# Altium PCB PCB1.PcbDoc (part 2 of 2)
Units mil, origin at the board's own origin, x right, y up, seen from the top; angles counter-clockwise.
Board outline 8251 x 7030 mil, 4 copper layers (Top Layer, Mid-Layer 1, Mid-Layer 2, Bottom Layer); 230 components, 122 nets, 652 pads, 23 vias.
Unrouted connection lines stored in the file: 312.
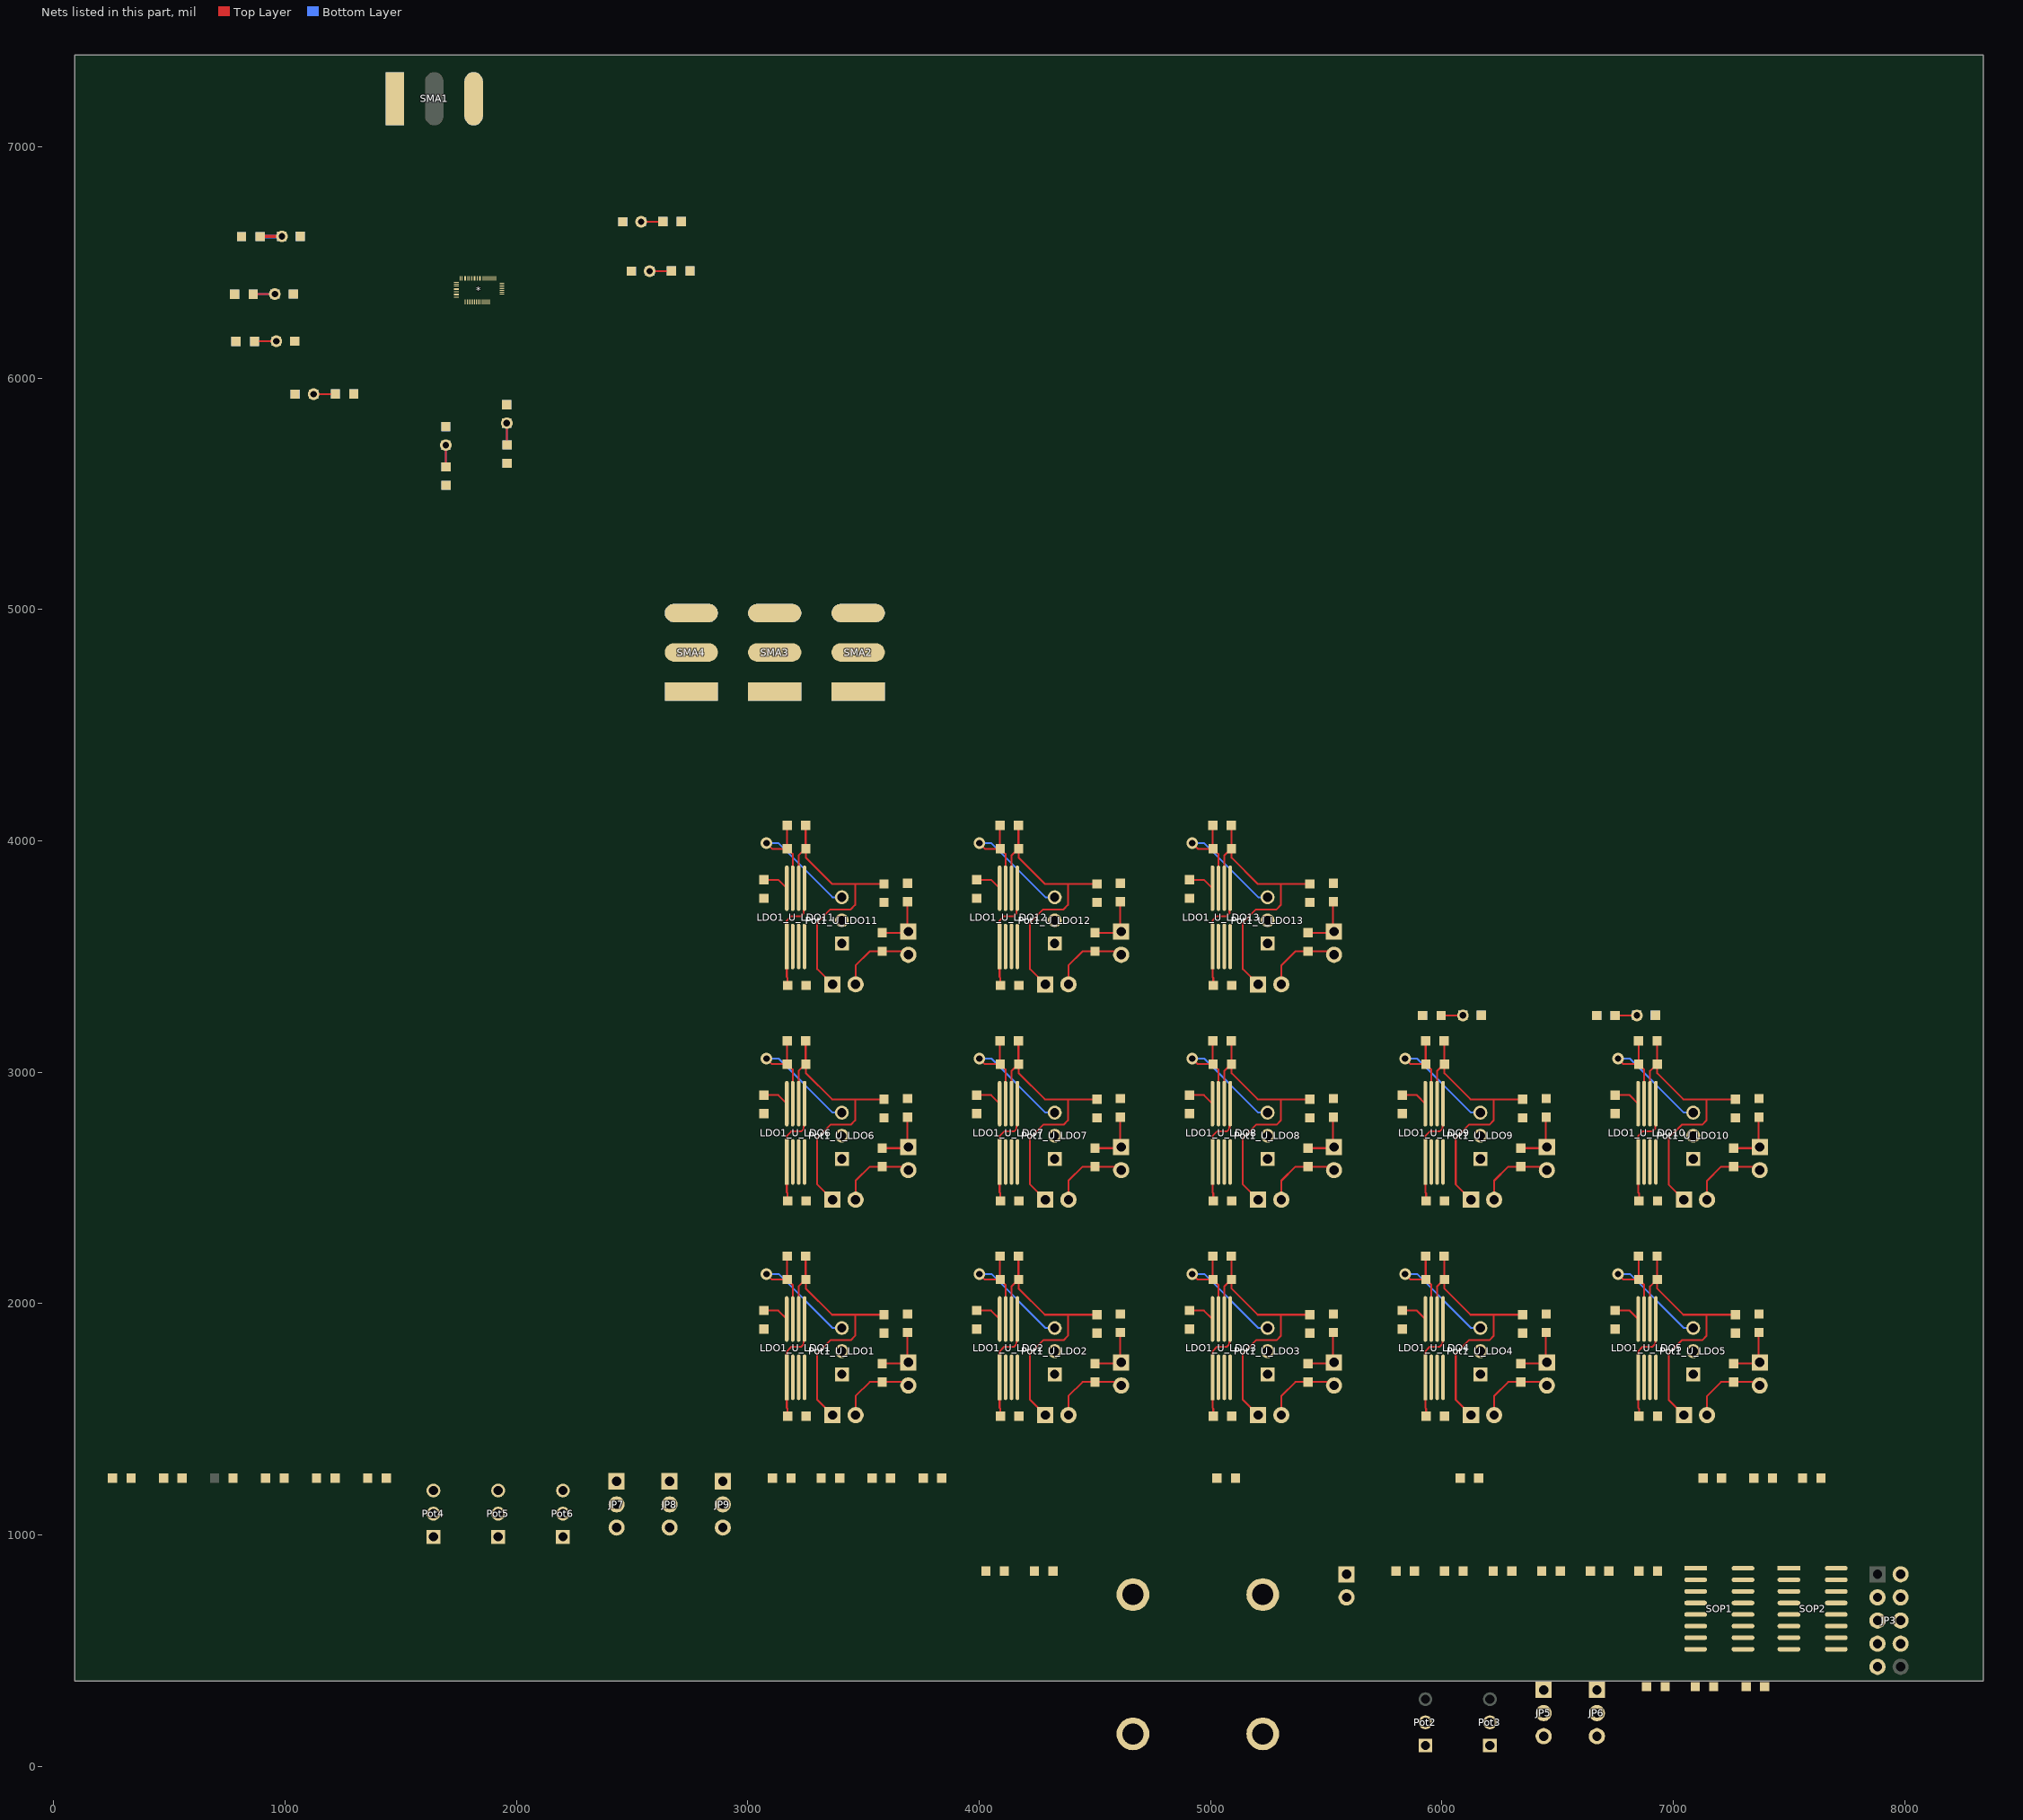
[diagram p2: the nets of this part, all layers, seen from the top]

## Components (designator, comment, footprint, x,y, rotation, side; value= is the part's Value field where it differs from the comment) (continued)
JP2_U_LDO12 "JP2" JUMPER2 4614,3608 r0 top (schematic designator JP2)
JP2_U_LDO13 "JP2" JUMPER2 5534,3608 r0 top (schematic designator JP2)
JP3 "JP10" JUMPER10 7883,830 r0 top
JP4 "JP2" JUMPER2 5588,830 r0 top
JP5 "JP3" JUMPER3 6440,330 r0 top
JP6 "JP3" JUMPER3 6670,330 r0 top
JP7 "JP3" JUMPER3 2433,1232 r0 top
JP8 "JP3" JUMPER3 2662,1232 r0 top
JP9 "JP3" JUMPER3 2892,1232 r0 top
LDO1_U_LDO1 "LDO" LT3060 3168.5,1681.5 r90 top (schematic designator LDO1)
LDO1_U_LDO2 "LDO" LT3060 4088.5,1681.5 r90 top (schematic designator LDO1)
LDO1_U_LDO3 "LDO" LT3060 5008.5,1681.5 r90 top (schematic designator LDO1)
LDO1_U_LDO4 "LDO" LT3060 5928.5,1681.5 r90 top (schematic designator LDO1)
LDO1_U_LDO5 "LDO" LT3060 6848.5,1681.5 r90 top (schematic designator LDO1)
LDO1_U_LDO6 "LDO" LT3060 3168.5,2612.5 r90 top (schematic designator LDO1)
LDO1_U_LDO7 "LDO" LT3060 4088.5,2612.5 r90 top (schematic designator LDO1)
LDO1_U_LDO8 "LDO" LT3060 5008.5,2612.5 r90 top (schematic designator LDO1)
LDO1_U_LDO9 "LDO" LT3060 5928.5,2612.5 r90 top (schematic designator LDO1)
LDO1_U_LDO10 "LDO" LT3060 6848.5,2612.5 r90 top (schematic designator LDO1)
LDO1_U_LDO11 "LDO" LT3060 3168.5,3543.5 r90 top (schematic designator LDO1)
LDO1_U_LDO12 "LDO" LT3060 4088.5,3543.5 r90 top (schematic designator LDO1)
LDO1_U_LDO13 "LDO" LT3060 5008.5,3543.5 r90 top (schematic designator LDO1)
Pot1_U_LDO1 "200k ohm" Pot 3406.5,1694.5 r90 top (schematic designator Pot1)
Pot1_U_LDO2 "200k ohm" Pot 4326.5,1694.5 r90 top (schematic designator Pot1)
Pot1_U_LDO3 "200k ohm" Pot 5246.5,1694.5 r90 top (schematic designator Pot1)
Pot1_U_LDO4 "200k ohm" Pot 6166.5,1694.5 r90 top (schematic designator Pot1)
Pot1_U_LDO5 "200k ohm" Pot 7086.5,1694.5 r90 top (schematic designator Pot1)
Pot1_U_LDO6 "200k ohm" Pot 3406.5,2625.5 r90 top (schematic designator Pot1)
Pot1_U_LDO7 "200k ohm" Pot 4326.5,2625.5 r90 top (schematic designator Pot1)
Pot1_U_LDO8 "200k ohm" Pot 5246.5,2625.5 r90 top (schematic designator Pot1)
Pot1_U_LDO9 "200k ohm" Pot 6166.5,2625.5 r90 top (schematic designator Pot1)
Pot1_U_LDO10 "200k ohm" Pot 7086.5,2625.5 r90 top (schematic designator Pot1)
Pot1_U_LDO11 "200k ohm" Pot 3406.5,3556.5 r90 top (schematic designator Pot1)
Pot1_U_LDO12 "200k ohm" Pot 4326.5,3556.5 r90 top (schematic designator Pot1)
Pot1_U_LDO13 "200k ohm" Pot 5246.5,3556.5 r90 top (schematic designator Pot1)
Pot2 "1k pot" Pot 5929,90 r90 top
Pot3 "1k pot" Pot 6208,90 r90 top
Pot4 "10k pot" Pot 1641,992 r90 top
Pot5 "10k pot" Pot 1921,992 r90 top
Pot6 "10k pot" Pot 2201,992 r90 top
R1_U_LDO1 "5 ohm" Resistor 3581,1701 r270 top (schematic designator R1)
R1_U_LDO2 "5 ohm" Resistor 4501,1701 r270 top (schematic designator R1)
R1_U_LDO3 "5 ohm" Resistor 5421,1701 r270 top (schematic designator R1)
R1_U_LDO4 "5 ohm" Resistor 6341,1701 r270 top (schematic designator R1)
R1_U_LDO5 "5 ohm" Resistor 7261,1701 r270 top (schematic designator R1)
R1_U_LDO6 "5 ohm" Resistor 3581,2632 r270 top (schematic designator R1)
R1_U_LDO7 "5 ohm" Resistor 4501,2632 r270 top (schematic designator R1)
R1_U_LDO8 "5 ohm" Resistor 5421,2632 r270 top (schematic designator R1)
R1_U_LDO9 "5 ohm" Resistor 6341,2632 r270 top (schematic designator R1)
R1_U_LDO10 "5 ohm" Resistor 7261,2632 r270 top (schematic designator R1)
R1_U_LDO11 "5 ohm" Resistor 3581,3563 r270 top (schematic designator R1)
R1_U_LDO12 "5 ohm" Resistor 4501,3563 r270 top (schematic designator R1)
R1_U_LDO13 "5 ohm" Resistor 5421,3563 r270 top (schematic designator R1)
R2_U_LDO1 "36k ohm" Resistor 3210,2205 r0 top (schematic designator R2)
R2_U_LDO2 "36k ohm" Resistor 4130,2205 r0 top (schematic designator R2)
R2_U_LDO3 "36k ohm" Resistor 5050,2205 r0 top (schematic designator R2)
R2_U_LDO4 "36k ohm" Resistor 5970,2205 r0 top (schematic designator R2)
R2_U_LDO5 "36k ohm" Resistor 6890,2205 r0 top (schematic designator R2)
R2_U_LDO6 "36k ohm" Resistor 3210,3136 r0 top (schematic designator R2)
R2_U_LDO7 "36k ohm" Resistor 4130,3136 r0 top (schematic designator R2)
R2_U_LDO8 "36k ohm" Resistor 5050,3136 r0 top (schematic designator R2)
R2_U_LDO9 "36k ohm" Resistor 5970,3136 r0 top (schematic designator R2)
R2_U_LDO10 "36k ohm" Resistor 6890,3136 r0 top (schematic designator R2)
R2_U_LDO11 "36k ohm" Resistor 3210,4067 r0 top (schematic designator R2)
R2_U_LDO12 "36k ohm" Resistor 4130,4067 r0 top (schematic designator R2)
R2_U_LDO13 "36k ohm" Resistor 5050,4067 r0 top (schematic designator R2)
R3 "10k" Resistor 6892,844 r0 top
R4 "10k" Resistor 6682,844 r0 top
R5 "10k" Resistor 6262,844 r0 top
R6 "10k" Resistor 6472,844 r0 top
R7 "10k" Resistor 5842,844 r0 top
R8 "10k" Resistor 6052,844 r0 top
R9 "100" Resistor 6925,344 r0 top
R10 "100" Resistor 7135,344 r0 top
R11 "1k" Resistor 3147,1246 r0 top
R12 "1k" Resistor 3357,1246 r0 top
R13 "1k" Resistor 3577,1246 r0 top
R14 "1k" Resistor 956,1246 r0 top
R15 "1k" Resistor 1176,1246 r0 top
R16 "1k" Resistor 1397,1246 r0 top
R17_U_SUPPLY_DECAP_NW1 "2ohm" Resistor 6131,3246 r0 top (schematic designator R17)
R17_U_SUPPLY_DECAP_NW2 "2ohm" Resistor 6883,3246 r0 top (schematic designator R17)
R17_U_SUPPLY_DECAP_NW3 "2ohm" Resistor 1083,5931 r180 top (schematic designator R17)
R17_U_SUPPLY_DECAP_NW4 "2ohm" Resistor 2499,6676 r180 top (schematic designator R17)
R17_U_SUPPLY_DECAP_NW5 "2ohm" Resistor 2536,6463 r180 top (schematic designator R17)
R17_U_SUPPLY_DECAP_NW6 "2ohm" Resistor 1695,5751 r90 top (schematic designator R17)
R17_U_SUPPLY_DECAP_NW7 "2ohm" Resistor 1958,5846 r90 top (schematic designator R17)
R17_U_SUPPLY_DECAP_NW8 "2ohm" Resistor 1002,6160 r0 top (schematic designator R17)
R17_U_SUPPLY_DECAP_NW9 "2ohm" Resistor 996,6364 r0 top (schematic designator R17)
R17_U_SUPPLY_DECAP_NW10 "2ohm" Resistor 1026,6613 r0 top (schematic designator R17)
SMA1 "SMA_EL" SMA_EL 1475,7208 r0 top
SMA2 "SMA_EL" SMA_EL 3477,4645 r90 top
SMA3 "SMA_EL" SMA_EL 3116,4645 r90 top
SMA4 "SMA_EL" SMA_EL 2756,4645 r90 top
SOP1 "74AVC4T245" 74AVC4T245 7097,856 r0 top
SOP2 "74AVC4T245" 74AVC4T245 7500,856 r0 top

## Footprints (in the part's own frame and the unit in brackets; to place one, negate y for a bottom-side part, rotate by r counter-clockwise, add the part's x,y. Pads: shape width x height; smd on the part's side, far side on the other; paste and mask are expansions set on the pad)
74AVC4T245 [mm]
  rect 2.5x0.5 smd: 1(0,0)
  oval 2.5x0.5 smd: 2(0,-1.27) 3(0,-2.54) 4(0,-3.81) 5(0,-5.08) 6(0,-6.35) 7(0,-7.62) 8(0,-8.89) 9(5.2,-8.89) 10(5.2,-7.62) 11(5.2,-6.35) 12(5.2,-5.08) 13(5.2,-3.81) 14(5.2,-2.54) 15(5.2,-1.27) 16(5.2,0)
  silkscreen extent -1.8,-9.53 6.95,0.64
BANANA_CONN [mm]
  round 3.6 hole 2.3: 1(0,0) 2(15.3,0)
  silkscreen extent -3.18,-6 18.41,6
Capacitor [mil]
  rect 40x40 smd: 0(40,0) 1(-40,0)
  silkscreen extent -76,-36 76,36
JUMPER2 [mil]
  rect 70x70 hole 40: 1(0,0)
  round 70 hole 40: 2(0,-100)
  silkscreen extent -50,-150 50,50
JUMPER3 [mil]
  rect 70x70 hole 40: 1(0,0)
  round 70 hole 40: 2(0,-100) 3(0,-200)
  silkscreen extent -50,-250 50,50
JUMPER10 [mil]
  rect 70x70 hole 40: 1(0,0)
  round 70 hole 40: 2(0,-100) 3(0,-200) 4(0,-300) 5(0,-400) 6(100,-400) 7(100,-300) 8(100,-200) 9(100,-100) 10(100,0)
  silkscreen extent -50,-450 150,50
LT3060 [mm]
  rect 5x0.4 smd: 1(0,0)
  oval 5x0.4 smd: 2(0,-0.65) 3(0,-1.3) 4(0,-1.95) 5(6.4,-1.95) 6(6.4,-1.3) 7(6.4,-0.65) 8(6.4,0)
  silkscreen extent -2.85,-2.54 9.27,0.71
PCBComponent_1 [mil]
  rect 20x4 smd mask+0: 1(21,103) 2(21,95) 3(21,87) 5(21,63) 7(21,39) 22(218,52) 23(218,60) 24(218,68) 25(218,76) 26(218,84) 27(218,92) 28(218,100)
  rect 20x8 smd mask+0: 4(21,75) 6(21,51)
  rect 4x20 smd mask+0: 8(60,19) 9(68,19) 10(76,19) 11(84,19) 12(92,19) 13(100,19) 14(108,19) 15(116,19) 16(124,19) 17(132,19) 18(140,19) 19(148,19) 20(156,19) 21(164,19) 29(192,121) 30(184,121) 31(176,121) 32(168,121) 33(160,121) 34(152,121) 35(144,121) 36(136,121) 38(112,121) 40(88,121) 41(79,121) 42(71,121) 44(46,121) 45(38,121)
  rect 8x20 smd mask+0: 37(124,121) 39(100,121) 43(59,121)
  Top Layer region: 37,36 200,36 200,104 37,104
  Top Layer region: 31,61 38,61 38,65 31,65
  silkscreen extent 63,64 143,102
Pot [mil]
  rect 59.88x59.88 / inner rect 67.76x67.76 / far side rect 59.88x59.88 hole 39.88: 1(0,0)
  round 59.88 / inner round 67.76 / far side round 59.88 hole 39.88: 2(100,0)
  round 59.88 / inner round 67.87 / far side round 59.88 hole 39.88: 3(200,0)
  silkscreen extent -93,-105 292,100
Resistor [mil]
  rect 40x40 smd: 0(40,0) 1(-40,0)
  silkscreen extent -76,-36 76,36
SMA_EL [mil]
  rect 80x230 smd: 1(0,0)
  rect 80x230 smd far side: 2(0,0)
  oval 80x230 smd: 3(340,0) 5(170,0)
  oval 80x230 smd far side: 4(340,0)
  silkscreen extent -116,-148 461,152

## Part data
C1_U_LDO1 C1_U_LDO2 C1_U_LDO3 C1_U_LDO4 C1_U_LDO5 C1_U_LDO6 C1_U_LDO7 C1_U_LDO8 C1_U_LDO9 C1_U_LDO10 C1_U_LDO11 C1_U_LDO12 C1_U_LDO13 C2_U_LDO1 C2_U_LDO2 C2_U_LDO3 C2_U_LDO4 C2_U_LDO5 C2_U_LDO6 C2_U_LDO7 C2_U_LDO8 C2_U_LDO9 C2_U_LDO10 C2_U_LDO11 C2_U_LDO12 C2_U_LDO13 C3_U_LDO1 C3_U_LDO2 C3_U_LDO3 C3_U_LDO4 C3_U_LDO5 C3_U_LDO6 C3_U_LDO7 C3_U_LDO8 C3_U_LDO9 C3_U_LDO10 C3_U_LDO11 C3_U_LDO12 C3_U_LDO13 C4_U_LDO1 C4_U_LDO2 C4_U_LDO3 C4_U_LDO4 C4_U_LDO5 C4_U_LDO6 C4_U_LDO7 C4_U_LDO8 C4_U_LDO9 C4_U_LDO10 C4_U_LDO11 C4_U_LDO12 C4_U_LDO13 C5_U_LDO1 C5_U_LDO2 C5_U_LDO3 C5_U_LDO4 C5_U_LDO5 C5_U_LDO6 C5_U_LDO7 C5_U_LDO8 C5_U_LDO9 C5_U_LDO10 C5_U_LDO11 C5_U_LDO12 C5_U_LDO13 C6 C7 C10 C11 C16 C17 C18: library part cap, "0603cap"
C8 C9 C12 C13 C15 C19_U_SUPPLY_DECAP_NW1 C19_U_SUPPLY_DECAP_NW2 C19_U_SUPPLY_DECAP_NW3 C19_U_SUPPLY_DECAP_NW4 C19_U_SUPPLY_DECAP_NW5 C19_U_SUPPLY_DECAP_NW6 C19_U_SUPPLY_DECAP_NW7 C19_U_SUPPLY_DECAP_NW8 C19_U_SUPPLY_DECAP_NW9 C19_U_SUPPLY_DECAP_NW10 C20_U_SUPPLY_DECAP_NW1 C20_U_SUPPLY_DECAP_NW2 C20_U_SUPPLY_DECAP_NW3 C20_U_SUPPLY_DECAP_NW4 C20_U_SUPPLY_DECAP_NW5 C20_U_SUPPLY_DECAP_NW6 C20_U_SUPPLY_DECAP_NW7 C20_U_SUPPLY_DECAP_NW8 C20_U_SUPPLY_DECAP_NW9 C20_U_SUPPLY_DECAP_NW10 C21_U_SUPPLY_DECAP_NW1 C21_U_SUPPLY_DECAP_NW2 C21_U_SUPPLY_DECAP_NW3 C21_U_SUPPLY_DECAP_NW4 C21_U_SUPPLY_DECAP_NW5 C21_U_SUPPLY_DECAP_NW6 C21_U_SUPPLY_DECAP_NW7 C21_U_SUPPLY_DECAP_NW8 C21_U_SUPPLY_DECAP_NW9 C21_U_SUPPLY_DECAP_NW10: "0603cap"
JP1_U_LDO1 JP1_U_LDO2 JP1_U_LDO3 JP1_U_LDO4 JP1_U_LDO5 JP1_U_LDO6 JP1_U_LDO7 JP1_U_LDO8 JP1_U_LDO9 JP1_U_LDO10 JP1_U_LDO11 JP1_U_LDO12 JP1_U_LDO13 JP2_U_LDO1 JP2_U_LDO2 JP2_U_LDO3 JP2_U_LDO4 JP2_U_LDO5 JP2_U_LDO6 JP2_U_LDO7 JP2_U_LDO8 JP2_U_LDO9 JP2_U_LDO10 JP2_U_LDO11 JP2_U_LDO12 JP2_U_LDO13 JP4: library part Jumper_2, "Jumper_2"
JP3: library part Jumper_10, "Jumper_10p"
JP5 JP6 JP7 JP8 JP9: library part Jumper_3, "Jumper_3p"
LDO1_U_LDO1 LDO1_U_LDO2 LDO1_U_LDO3 LDO1_U_LDO4 LDO1_U_LDO5 LDO1_U_LDO6 LDO1_U_LDO7 LDO1_U_LDO8 LDO1_U_LDO9 LDO1_U_LDO10 LDO1_U_LDO11 LDO1_U_LDO12 LDO1_U_LDO13: library part LT3060, "LT3060 LDO"
Pot1_U_LDO1 Pot1_U_LDO2 Pot1_U_LDO3 Pot1_U_LDO4 Pot1_U_LDO5 Pot1_U_LDO6 Pot1_U_LDO7 Pot1_U_LDO8 Pot1_U_LDO9 Pot1_U_LDO10 Pot1_U_LDO11 Pot1_U_LDO12 Pot1_U_LDO13 Pot2 Pot3 Pot4 Pot5 Pot6: library part Pot, "Variable Resistor"
R1_U_LDO1 R1_U_LDO2 R1_U_LDO3 R1_U_LDO4 R1_U_LDO5 R1_U_LDO6 R1_U_LDO7 R1_U_LDO8 R1_U_LDO9 R1_U_LDO10 R1_U_LDO11 R1_U_LDO12 R1_U_LDO13 R2_U_LDO1 R2_U_LDO2 R2_U_LDO3 R2_U_LDO4 R2_U_LDO5 R2_U_LDO6 R2_U_LDO7 R2_U_LDO8 R2_U_LDO9 R2_U_LDO10 R2_U_LDO11 R2_U_LDO12 R2_U_LDO13 R3 R4 R5 R6 R7 R8 R9 R10 R11 R12 R13 R14 R15 R16 R17_U_SUPPLY_DECAP_NW1 R17_U_SUPPLY_DECAP_NW2 R17_U_SUPPLY_DECAP_NW3 R17_U_SUPPLY_DECAP_NW4 R17_U_SUPPLY_DECAP_NW5 R17_U_SUPPLY_DECAP_NW6 R17_U_SUPPLY_DECAP_NW7 R17_U_SUPPLY_DECAP_NW8 R17_U_SUPPLY_DECAP_NW9 R17_U_SUPPLY_DECAP_NW10: library part res, "0603Res"
SOP1 SOP2: "74AVC4T245 Voltage Shifter"

## Via types
v1: diameter 50, hole 28, Top Layer to Bottom Layer, 23 vias

## Nets (pads, with @x,y where several pads share a name; then routed paths per layer and width w, separated by ;. In a path a pad name is that pad's centre, name@x,y a point inside that pad or via, vN(x,y) a via of type N, cw(c..) or ccw(c..) an arc to the next point about the centre after c; other vN are vias at no path point)
AC_COUPLED_GND: *.6 C13.0
DLL_EXT_VCTRL: *.8 C16.0 JP7.2
DVDD_NC: SOP1.16 SOP2.16
ESD_VDD: *.29 C2_U_LDO3.1 C8.1 JP2_U_LDO3.1 R1_U_LDO3.1 | length 242.8
  Top Layer w8: R1_U_LDO3.1@5421,1741 5529,1741 5529,1873 C2_U_LDO3.1@5531,1875
FLL_EXT_VCTRL: *.30 C17.0 JP8.2
GND: *.3 *.5 *.10 *.13 *.16 *.27 *.32 *.36 *.38 *.40 *.42 *.44 BANANA1.1 BANANA1.2 C1_U_LDO1.0 C1_U_LDO2.0 C1_U_LDO3.0 C1_U_LDO4.0 C1_U_LDO5.0 C1_U_LDO6.0 C1_U_LDO7.0 C1_U_LDO8.0 C1_U_LDO9.0 C1_U_LDO10.0 C1_U_LDO11.0 C1_U_LDO12.0 C1_U_LDO13.0 C2_U_LDO1.0 C2_U_LDO2.0 C2_U_LDO3.0 C2_U_LDO4.0 C2_U_LDO5.0 C2_U_LDO6.0 C2_U_LDO7.0 C2_U_LDO8.0 C2_U_LDO9.0 C2_U_LDO10.0 C2_U_LDO11.0 C2_U_LDO12.0 C2_U_LDO13.0 C4_U_LDO1.0 C4_U_LDO2.0 C4_U_LDO3.0 C4_U_LDO4.0 C4_U_LDO5.0 C4_U_LDO6.0 C4_U_LDO7.0 C4_U_LDO8.0 C4_U_LDO9.0 C4_U_LDO10.0 C4_U_LDO11.0 C4_U_LDO12.0 C4_U_LDO13.0 C5_U_LDO1.1 C5_U_LDO2.1 C5_U_LDO3.1 C5_U_LDO4.1 C5_U_LDO5.1 C5_U_LDO6.1 C5_U_LDO7.1 C5_U_LDO8.1 C5_U_LDO9.1 C5_U_LDO10.1 C5_U_LDO11.1 C5_U_LDO12.1 C5_U_LDO13.1 C6.1 C7.1 C8.0 C10.1 C11.1 C13.1 C19_U_SUPPLY_DECAP_NW1.0 C19_U_SUPPLY_DECAP_NW2.0 C19_U_SUPPLY_DECAP_NW3.0 C19_U_SUPPLY_DECAP_NW4.0 C19_U_SUPPLY_DECAP_NW5.0 C19_U_SUPPLY_DECAP_NW6.0 C19_U_SUPPLY_DECAP_NW7.0 C19_U_SUPPLY_DECAP_NW8.0 C19_U_SUPPLY_DECAP_NW9.0 C19_U_SUPPLY_DECAP_NW10.0 C20_U_SUPPLY_DECAP_NW1.0 C20_U_SUPPLY_DECAP_NW2.0 C20_U_SUPPLY_DECAP_NW3.0 C20_U_SUPPLY_DECAP_NW4.0 C20_U_SUPPLY_DECAP_NW5.0 C20_U_SUPPLY_DECAP_NW6.0 C20_U_SUPPLY_DECAP_NW7.0 C20_U_SUPPLY_DECAP_NW8.0 C20_U_SUPPLY_DECAP_NW9.0 C20_U_SUPPLY_DECAP_NW10.0 C21_U_SUPPLY_DECAP_NW1.0 C21_U_SUPPLY_DECAP_NW2.0 C21_U_SUPPLY_DECAP_NW3.0 C21_U_SUPPLY_DECAP_NW4.0 C21_U_SUPPLY_DECAP_NW5.0 C21_U_SUPPLY_DECAP_NW6.0 C21_U_SUPPLY_DECAP_NW7.0 C21_U_SUPPLY_DECAP_NW8.0 C21_U_SUPPLY_DECAP_NW9.0 C21_U_SUPPLY_DECAP_NW10.0 JP3.5 JP5.3 JP6.3 LDO1_U_LDO1.2 LDO1_U_LDO1.3 LDO1_U_LDO1.4 LDO1_U_LDO2.2 LDO1_U_LDO2.3 LDO1_U_LDO2.4 LDO1_U_LDO3.2 LDO1_U_LDO3.3 LDO1_U_LDO3.4 LDO1_U_LDO4.2 LDO1_U_LDO4.3 LDO1_U_LDO4.4 LDO1_U_LDO5.2 LDO1_U_LDO5.3 LDO1_U_LDO5.4 LDO1_U_LDO6.2 LDO1_U_LDO6.3 LDO1_U_LDO6.4 LDO1_U_LDO7.2 LDO1_U_LDO7.3 LDO1_U_LDO7.4 LDO1_U_LDO8.2 LDO1_U_LDO8.3 LDO1_U_LDO8.4 LDO1_U_LDO9.2 LDO1_U_LDO9.3 LDO1_U_LDO9.4 LDO1_U_LDO10.2 LDO1_U_LDO10.3 LDO1_U_LDO10.4 LDO1_U_LDO11.2 LDO1_U_LDO11.3 LDO1_U_LDO11.4 LDO1_U_LDO12.2 LDO1_U_LDO12.3 LDO1_U_LDO12.4 LDO1_U_LDO13.2 LDO1_U_LDO13.3 LDO1_U_LDO13.4 Pot1_U_LDO1.1 Pot1_U_LDO1.2 Pot1_U_LDO2.1 Pot1_U_LDO2.2 Pot1_U_LDO3.1 Pot1_U_LDO3.2 Pot1_U_LDO4.1 Pot1_U_LDO4.2 Pot1_U_LDO5.1 Pot1_U_LDO5.2 Pot1_U_LDO6.1 Pot1_U_LDO6.2 Pot1_U_LDO7.1 Pot1_U_LDO7.2 Pot1_U_LDO8.1 Pot1_U_LDO8.2 Pot1_U_LDO9.1 Pot1_U_LDO9.2 Pot1_U_LDO10.1 Pot1_U_LDO10.2 Pot1_U_LDO11.1 Pot1_U_LDO11.2 Pot1_U_LDO12.1 Pot1_U_LDO12.2 Pot1_U_LDO13.1 Pot1_U_LDO13.2 R3.1 R4.1 R5.1 R6.1 R7.1 R8.1 R14.0 R15.0 R16.0 SMA1.1 SMA1.2 SMA1.3 SMA1.4 SMA2.1 SMA2.2 SMA2.3 SMA2.4 SMA3.1 SMA3.2 SMA3.3 SMA3.4 SMA4.1 SMA4.2 SMA4.3 SMA4.4 SOP1.8 SOP1.9 SOP1.14 SOP1.15 SOP2.3 SOP2.8 SOP2.9 SOP2.14 SOP2.15
IBIAS25U_DAC_DLL: *.9 C10.0 JP5.2
IBIAS25U_DAC_PLL: *.18 C11.0 JP6.2
IN_U_LDO1: BANANA2.1 BANANA2.2 C5_U_LDO1.0 C5_U_LDO2.0 C5_U_LDO3.0 C5_U_LDO4.0 C5_U_LDO5.0 C5_U_LDO6.0 C5_U_LDO7.0 C5_U_LDO8.0 C5_U_LDO9.0 C5_U_LDO10.0 C5_U_LDO11.0 C5_U_LDO12.0 C5_U_LDO13.0 C6.0 LDO1_U_LDO1.1 LDO1_U_LDO1.5 LDO1_U_LDO2.1 LDO1_U_LDO2.5 LDO1_U_LDO3.1 LDO1_U_LDO3.5 LDO1_U_LDO4.1 LDO1_U_LDO4.5 LDO1_U_LDO5.1 LDO1_U_LDO5.5 LDO1_U_LDO6.1 LDO1_U_LDO6.5 LDO1_U_LDO7.1 LDO1_U_LDO7.5 LDO1_U_LDO8.1 LDO1_U_LDO8.5 LDO1_U_LDO9.1 LDO1_U_LDO9.5 LDO1_U_LDO10.1 LDO1_U_LDO10.5 LDO1_U_LDO11.1 LDO1_U_LDO11.5 LDO1_U_LDO12.1 LDO1_U_LDO12.5 LDO1_U_LDO13.1 LDO1_U_LDO13.5 SOP1.1 SOP1.2 SOP1.3 SOP2.1 SOP2.2 | length 6282.5
  Top Layer w8: C5_U_LDO1.0@3168.5,1516.5 C5_U_LDO1.0@3172,1513 3172,1546 3168.5,1549.5 LDO1_U_LDO1.1@3168.5,1681.5 3168.5,1793.5 3188,1813 3230,1813 3242,1825 3242,1930.2 LDO1_U_LDO1.5@3245.27,1933.47 ; C5_U_LDO6.0@3168.5,2447.5 C5_U_LDO6.0@3172,2444 3172,2477 3168.5,2480.5 LDO1_U_LDO6.1@3168.5,2612.5 3168.5,2724.5 3188,2744 3230,2744 3242,2756 3242,2861.2 LDO1_U_LDO6.5@3245.27,2864.47 ; C5_U_LDO11.0@3168.5,3378.5 C5_U_LDO11.0@3172,3375 3172,3408 3168.5,3411.5 LDO1_U_LDO11.1@3168.5,3543.5 3168.5,3655.5 3188,3675 3230,3675 3242,3687 3242,3792.2 LDO1_U_LDO11.5@3245.27,3795.47 ; C5_U_LDO2.0@4088.5,1516.5 C5_U_LDO2.0@4092,1513 4092,1546 4088.5,1549.5 LDO1_U_LDO2.1@4088.5,1681.5 4088.5,1793.5 4108,1813 4150,1813 4162,1825 4162,1930.2 LDO1_U_LDO2.5@4165.27,1933.47 ; C5_U_LDO7.0@4088.5,2447.5 C5_U_LDO7.0@4092,2444 4092,2477 4088.5,2480.5 LDO1_U_LDO7.1@4088.5,2612.5 4088.5,2724.5 4108,2744 4150,2744 4162,2756 4162,2861.2 LDO1_U_LDO7.5@4165.27,2864.47 ; C5_U_LDO12.0@4088.5,3378.5 C5_U_LDO12.0@4092,3375 4092,3408 4088.5,3411.5 LDO1_U_LDO12.1@4088.5,3543.5 4088.5,3655.5 4108,3675 4150,3675 4162,3687 4162,3792.2 LDO1_U_LDO12.5@4165.27,3795.47 ; C5_U_LDO3.0@5008.5,1516.5 C5_U_LDO3.0@5012,1513 5012,1546 5008.5,1549.5 LDO1_U_LDO3.1@5008.5,1681.5 5008.5,1793.5 5028,1813 5070,1813 5082,1825 5082,1930.2 LDO1_U_LDO3.5@5085.27,1933.47 ; C5_U_LDO8.0@5008.5,2447.5 C5_U_LDO8.0@5012,2444 5012,2477 5008.5,2480.5 LDO1_U_LDO8.1@5008.5,2612.5 5008.5,2724.5 5028,2744 5070,2744 5082,2756 5082,2861.2 LDO1_U_LDO8.5@5085.27,2864.47 ; C5_U_LDO13.0@5008.5,3378.5 C5_U_LDO13.0@5012,3375 5012,3408 5008.5,3411.5 LDO1_U_LDO13.1@5008.5,3543.5 5008.5,3655.5 5028,3675 5070,3675 5082,3687 5082,3792.2 LDO1_U_LDO13.5@5085.27,3795.47 ; C5_U_LDO4.0@5928.5,1516.5 C5_U_LDO4.0@5932,1513 5932,1546 5928.5,1549.5 LDO1_U_LDO4.1@5928.5,1681.5 5928.5,1793.5 5948,1813 5990,1813 6002,1825 6002,1930.2 LDO1_U_LDO4.5@6005.27,1933.47 ; C5_U_LDO9.0@5928.5,2447.5 C5_U_LDO9.0@5932,2444 5932,2477 5928.5,2480.5 LDO1_U_LDO9.1@5928.5,2612.5 5928.5,2724.5 5948,2744 5990,2744 6002,2756 6002,2861.2 LDO1_U_LDO9.5@6005.27,2864.47 ; C5_U_LDO5.0@6848.5,1516.5 C5_U_LDO5.0@6852,1513 6852,1546 6848.5,1549.5 LDO1_U_LDO5.1@6848.5,1681.5 6848.5,1793.5 6868,1813 6910,1813 6922,1825 6922,1930.2 LDO1_U_LDO5.5@6925.27,1933.47 ; C5_U_LDO10.0@6848.5,2447.5 C5_U_LDO10.0@6852,2444 6852,2477 6848.5,2480.5 LDO1_U_LDO10.1@6848.5,2612.5 6848.5,2724.5 6868,2744 6910,2744 6922,2756 6922,2861.2 LDO1_U_LDO10.5@6925.27,2864.47
INCLK: *.4 C9.0
MC_RESETB: JP3.8 R6.0 SOP2.4
MC_SCAN_CLK: JP3.4 R7.0 SOP1.6
MC_SCAN_CLK2: JP3.3 R5.0 SOP1.5
MC_SCAN_EN: JP3.7 R8.0 SOP1.7
MC_SCAN_IN: JP3.2 R4.0 SOP1.4
MC_SCAN_LOAD: JP3.10 R3.0 SOP2.5
MC_SCAN_OUT: JP3.9 SOP2.7
MC_SERIAL_READ_OUT: SOP2.6
NetC1_U_LDO1_1: C1_U_LDO1.1 LDO1_U_LDO1.8 | length 114.6
  Top Layer w8: C1_U_LDO1.1@3069,1970 3131.97,1970 LDO1_U_LDO1.8@3168.5,1933.47
NetC1_U_LDO2_1: C1_U_LDO2.1 LDO1_U_LDO2.8 | length 114.6
  Top Layer w8: C1_U_LDO2.1@3989,1970 4051.97,1970 LDO1_U_LDO2.8@4088.5,1933.47
NetC1_U_LDO3_1: C1_U_LDO3.1 LDO1_U_LDO3.8 | length 114.6
  Top Layer w8: C1_U_LDO3.1@4909,1970 4971.97,1970 LDO1_U_LDO3.8@5008.5,1933.47
NetC1_U_LDO4_1: C1_U_LDO4.1 LDO1_U_LDO4.8 | length 114.6
  Top Layer w8: C1_U_LDO4.1@5829,1970 5891.97,1970 LDO1_U_LDO4.8@5928.5,1933.47
NetC1_U_LDO5_1: C1_U_LDO5.1 LDO1_U_LDO5.8 | length 114.6
  Top Layer w8: C1_U_LDO5.1@6749,1970 6811.97,1970 LDO1_U_LDO5.8@6848.5,1933.47
NetC1_U_LDO6_1: C1_U_LDO6.1 LDO1_U_LDO6.8 | length 114.6
  Top Layer w8: C1_U_LDO6.1@3069,2901 3131.97,2901 LDO1_U_LDO6.8@3168.5,2864.47
NetC1_U_LDO7_1: C1_U_LDO7.1 LDO1_U_LDO7.8 | length 114.6
  Top Layer w8: C1_U_LDO7.1@3989,2901 4051.97,2901 LDO1_U_LDO7.8@4088.5,2864.47
NetC1_U_LDO8_1: C1_U_LDO8.1 LDO1_U_LDO8.8 | length 114.6
  Top Layer w8: C1_U_LDO8.1@4909,2901 4971.97,2901 LDO1_U_LDO8.8@5008.5,2864.47
NetC1_U_LDO9_1: C1_U_LDO9.1 LDO1_U_LDO9.8 | length 114.6
  Top Layer w8: C1_U_LDO9.1@5829,2901 5891.97,2901 LDO1_U_LDO9.8@5928.5,2864.47
NetC1_U_LDO10_1: C1_U_LDO10.1 LDO1_U_LDO10.8 | length 114.6
  Top Layer w8: C1_U_LDO10.1@6749,2901 6811.97,2901 LDO1_U_LDO10.8@6848.5,2864.47
NetC1_U_LDO11_1: C1_U_LDO11.1 LDO1_U_LDO11.8 | length 114.6
  Top Layer w8: C1_U_LDO11.1@3069,3832 3131.97,3832 LDO1_U_LDO11.8@3168.5,3795.47
NetC1_U_LDO12_1: C1_U_LDO12.1 LDO1_U_LDO12.8 | length 114.6
  Top Layer w8: C1_U_LDO12.1@3989,3832 4051.97,3832 LDO1_U_LDO12.8@4088.5,3795.47
NetC1_U_LDO13_1: C1_U_LDO13.1 LDO1_U_LDO13.8 | length 114.6
  Top Layer w8: C1_U_LDO13.1@4909,3832 4971.97,3832 LDO1_U_LDO13.8@5008.5,3795.47
NetC3_U_LDO1_0: C3_U_LDO1.0 LDO1_U_LDO1.7 Pot1_U_LDO1.3 R2_U_LDO1.1 | length 790.7
  Top Layer w8: v1(3081,2128) 3105,2104 C3_U_LDO1.0@3171,2104 ; R2_U_LDO1.1@3170,2192 3170,2105 C3_U_LDO1.0@3171,2104 ; LDO1_U_LDO1.7@3194.09,1933.47 3194.09,2080.91 C3_U_LDO1.0@3171,2104
  Bottom Layer w8: v1(3081,2128) 3133,2128 3366.5,1894.5 Pot1_U_LDO1.3@3406.5,1894.5
NetC3_U_LDO1_1: C3_U_LDO1.1 C4_U_LDO1.1 JP1_U_LDO1.1 LDO1_U_LDO1.6 R2_U_LDO1.0 | length 1289.9
  Top Layer w8: LDO1_U_LDO1.6@3219.68,1933.47 3219.68,2074.68 3250,2105 R2_U_LDO1.0@3250,2192 ; C3_U_LDO1.1@3251,2104 3251,2065 3364,1952 3464,1952 ; JP1_U_LDO1.1@3376,1528 JP1_U_LDO1.1@3366,1518 3300,1584 3300,1785 3357,1842 3445,1842 3464,1861 3464,1952 ; C4_U_LDO1.1@3589,1952 3464,1952
NetC3_U_LDO2_0: C3_U_LDO2.0 LDO1_U_LDO2.7 Pot1_U_LDO2.3 R2_U_LDO2.1 | length 790.7
  Top Layer w8: v1(4001,2128) 4025,2104 C3_U_LDO2.0@4091,2104 ; R2_U_LDO2.1@4090,2192 4090,2105 C3_U_LDO2.0@4091,2104 ; LDO1_U_LDO2.7@4114.09,1933.47 4114.09,2080.91 C3_U_LDO2.0@4091,2104
  Bottom Layer w8: v1(4001,2128) 4053,2128 4286.5,1894.5 Pot1_U_LDO2.3@4326.5,1894.5
NetC3_U_LDO2_1: C3_U_LDO2.1 C4_U_LDO2.1 JP1_U_LDO2.1 LDO1_U_LDO2.6 R2_U_LDO2.0 | length 1289.9
  Top Layer w8: LDO1_U_LDO2.6@4139.68,1933.47 4139.68,2074.68 4170,2105 R2_U_LDO2.0@4170,2192 ; C3_U_LDO2.1@4171,2104 4171,2065 4284,1952 4384,1952 ; JP1_U_LDO2.1@4296,1528 JP1_U_LDO2.1@4286,1518 4220,1584 4220,1785 4277,1842 4365,1842 4384,1861 4384,1952 ; C4_U_LDO2.1@4509,1952 4384,1952
NetC3_U_LDO3_0: C3_U_LDO3.0 LDO1_U_LDO3.7 Pot1_U_LDO3.3 R2_U_LDO3.1 | length 790.7
  Top Layer w8: v1(4921,2128) 4945,2104 C3_U_LDO3.0@5011,2104 ; R2_U_LDO3.1@5010,2192 5010,2105 C3_U_LDO3.0@5011,2104 ; LDO1_U_LDO3.7@5034.09,1933.47 5034.09,2080.91 C3_U_LDO3.0@5011,2104
  Bottom Layer w8: v1(4921,2128) 4973,2128 5206.5,1894.5 Pot1_U_LDO3.3@5246.5,1894.5
NetC3_U_LDO3_1: C3_U_LDO3.1 C4_U_LDO3.1 JP1_U_LDO3.1 LDO1_U_LDO3.6 R2_U_LDO3.0 | length 1289.9
  Top Layer w8: LDO1_U_LDO3.6@5059.68,1933.47 5059.68,2074.68 5090,2105 R2_U_LDO3.0@5090,2192 ; C3_U_LDO3.1@5091,2104 5091,2065 5204,1952 5304,1952 ; JP1_U_LDO3.1@5216,1528 JP1_U_LDO3.1@5206,1518 5140,1584 5140,1785 5197,1842 5285,1842 5304,1861 5304,1952 ; C4_U_LDO3.1@5429,1952 5304,1952
NetC3_U_LDO4_0: C3_U_LDO4.0 LDO1_U_LDO4.7 Pot1_U_LDO4.3 R2_U_LDO4.1 | length 790.7
  Top Layer w8: v1(5841,2128) 5865,2104 C3_U_LDO4.0@5931,2104 ; R2_U_LDO4.1@5930,2192 5930,2105 C3_U_LDO4.0@5931,2104 ; LDO1_U_LDO4.7@5954.09,1933.47 5954.09,2080.91 C3_U_LDO4.0@5931,2104
  Bottom Layer w8: v1(5841,2128) 5893,2128 6126.5,1894.5 Pot1_U_LDO4.3@6166.5,1894.5
NetC3_U_LDO4_1: C3_U_LDO4.1 C4_U_LDO4.1 JP1_U_LDO4.1 LDO1_U_LDO4.6 R2_U_LDO4.0 | length 1289.9
  Top Layer w8: LDO1_U_LDO4.6@5979.68,1933.47 5979.68,2074.68 6010,2105 R2_U_LDO4.0@6010,2192 ; C3_U_LDO4.1@6011,2104 6011,2065 6124,1952 6224,1952 ; JP1_U_LDO4.1@6136,1528 JP1_U_LDO4.1@6126,1518 6060,1584 6060,1785 6117,1842 6205,1842 6224,1861 6224,1952 ; C4_U_LDO4.1@6349,1952 6224,1952
NetC3_U_LDO5_0: C3_U_LDO5.0 LDO1_U_LDO5.7 Pot1_U_LDO5.3 R2_U_LDO5.1 | length 790.7
  Top Layer w8: v1(6761,2128) 6785,2104 C3_U_LDO5.0@6851,2104 ; R2_U_LDO5.1@6850,2192 6850,2105 C3_U_LDO5.0@6851,2104 ; LDO1_U_LDO5.7@6874.09,1933.47 6874.09,2080.91 C3_U_LDO5.0@6851,2104
  Bottom Layer w8: v1(6761,2128) 6813,2128 7046.5,1894.5 Pot1_U_LDO5.3@7086.5,1894.5
NetC3_U_LDO5_1: C3_U_LDO5.1 C4_U_LDO5.1 JP1_U_LDO5.1 LDO1_U_LDO5.6 R2_U_LDO5.0 | length 1289.9
  Top Layer w8: LDO1_U_LDO5.6@6899.68,1933.47 6899.68,2074.68 6930,2105 R2_U_LDO5.0@6930,2192 ; C3_U_LDO5.1@6931,2104 6931,2065 7044,1952 7144,1952 ; JP1_U_LDO5.1@7056,1528 JP1_U_LDO5.1@7046,1518 6980,1584 6980,1785 7037,1842 7125,1842 7144,1861 7144,1952 ; C4_U_LDO5.1@7269,1952 7144,1952
NetC3_U_LDO6_0: C3_U_LDO6.0 LDO1_U_LDO6.7 Pot1_U_LDO6.3 R2_U_LDO6.1 | length 790.7
  Top Layer w8: v1(3081,3059) 3105,3035 C3_U_LDO6.0@3171,3035 ; R2_U_LDO6.1@3170,3123 3170,3036 C3_U_LDO6.0@3171,3035 ; LDO1_U_LDO6.7@3194.09,2864.47 3194.09,3011.91 C3_U_LDO6.0@3171,3035
  Bottom Layer w8: v1(3081,3059) 3133,3059 3366.5,2825.5 Pot1_U_LDO6.3@3406.5,2825.5
NetC3_U_LDO6_1: C3_U_LDO6.1 C4_U_LDO6.1 JP1_U_LDO6.1 LDO1_U_LDO6.6 R2_U_LDO6.0 | length 1289.9
  Top Layer w8: LDO1_U_LDO6.6@3219.68,2864.47 3219.68,3005.68 3250,3036 R2_U_LDO6.0@3250,3123 ; C3_U_LDO6.1@3251,3035 3251,2996 3364,2883 3464,2883 ; JP1_U_LDO6.1@3376,2459 JP1_U_LDO6.1@3366,2449 3300,2515 3300,2716 3357,2773 3445,2773 3464,2792 3464,2883 ; C4_U_LDO6.1@3589,2883 3464,2883
NetC3_U_LDO7_0: C3_U_LDO7.0 LDO1_U_LDO7.7 Pot1_U_LDO7.3 R2_U_LDO7.1 | length 790.7
  Top Layer w8: v1(4001,3059) 4025,3035 C3_U_LDO7.0@4091,3035 ; R2_U_LDO7.1@4090,3123 4090,3036 C3_U_LDO7.0@4091,3035 ; LDO1_U_LDO7.7@4114.09,2864.47 4114.09,3011.91 C3_U_LDO7.0@4091,3035
  Bottom Layer w8: v1(4001,3059) 4053,3059 4286.5,2825.5 Pot1_U_LDO7.3@4326.5,2825.5
NetC3_U_LDO7_1: C3_U_LDO7.1 C4_U_LDO7.1 JP1_U_LDO7.1 LDO1_U_LDO7.6 R2_U_LDO7.0 | length 1289.9
  Top Layer w8: LDO1_U_LDO7.6@4139.68,2864.47 4139.68,3005.68 4170,3036 R2_U_LDO7.0@4170,3123 ; C3_U_LDO7.1@4171,3035 4171,2996 4284,2883 4384,2883 ; JP1_U_LDO7.1@4296,2459 JP1_U_LDO7.1@4286,2449 4220,2515 4220,2716 4277,2773 4365,2773 4384,2792 4384,2883 ; C4_U_LDO7.1@4509,2883 4384,2883
NetC3_U_LDO8_0: C3_U_LDO8.0 LDO1_U_LDO8.7 Pot1_U_LDO8.3 R2_U_LDO8.1 | length 790.7
  Top Layer w8: v1(4921,3059) 4945,3035 C3_U_LDO8.0@5011,3035 ; R2_U_LDO8.1@5010,3123 5010,3036 C3_U_LDO8.0@5011,3035 ; LDO1_U_LDO8.7@5034.09,2864.47 5034.09,3011.91 C3_U_LDO8.0@5011,3035
  Bottom Layer w8: v1(4921,3059) 4973,3059 5206.5,2825.5 Pot1_U_LDO8.3@5246.5,2825.5
NetC3_U_LDO8_1: C3_U_LDO8.1 C4_U_LDO8.1 JP1_U_LDO8.1 LDO1_U_LDO8.6 R2_U_LDO8.0 | length 1289.9
  Top Layer w8: LDO1_U_LDO8.6@5059.68,2864.47 5059.68,3005.68 5090,3036 R2_U_LDO8.0@5090,3123 ; C3_U_LDO8.1@5091,3035 5091,2996 5204,2883 5304,2883 ; JP1_U_LDO8.1@5216,2459 JP1_U_LDO8.1@5206,2449 5140,2515 5140,2716 5197,2773 5285,2773 5304,2792 5304,2883 ; C4_U_LDO8.1@5429,2883 5304,2883
NetC3_U_LDO9_0: C3_U_LDO9.0 LDO1_U_LDO9.7 Pot1_U_LDO9.3 R2_U_LDO9.1 | length 790.7
  Top Layer w8: v1(5841,3059) 5865,3035 C3_U_LDO9.0@5931,3035 ; R2_U_LDO9.1@5930,3123 5930,3036 C3_U_LDO9.0@5931,3035 ; LDO1_U_LDO9.7@5954.09,2864.47 5954.09,3011.91 C3_U_LDO9.0@5931,3035
  Bottom Layer w8: v1(5841,3059) 5893,3059 6126.5,2825.5 Pot1_U_LDO9.3@6166.5,2825.5
NetC3_U_LDO9_1: C3_U_LDO9.1 C4_U_LDO9.1 JP1_U_LDO9.1 LDO1_U_LDO9.6 R2_U_LDO9.0 | length 1289.9
  Top Layer w8: LDO1_U_LDO9.6@5979.68,2864.47 5979.68,3005.68 6010,3036 R2_U_LDO9.0@6010,3123 ; C3_U_LDO9.1@6011,3035 6011,2996 6124,2883 6224,2883 ; JP1_U_LDO9.1@6136,2459 JP1_U_LDO9.1@6126,2449 6060,2515 6060,2716 6117,2773 6205,2773 6224,2792 6224,2883 ; C4_U_LDO9.1@6349,2883 6224,2883
NetC3_U_LDO10_0: C3_U_LDO10.0 LDO1_U_LDO10.7 Pot1_U_LDO10.3 R2_U_LDO10.1 | length 790.7
  Top Layer w8: v1(6761,3059) 6785,3035 C3_U_LDO10.0@6851,3035 ; R2_U_LDO10.1@6850,3123 6850,3036 C3_U_LDO10.0@6851,3035 ; LDO1_U_LDO10.7@6874.09,2864.47 6874.09,3011.91 C3_U_LDO10.0@6851,3035
  Bottom Layer w8: v1(6761,3059) 6813,3059 7046.5,2825.5 Pot1_U_LDO10.3@7086.5,2825.5
NetC3_U_LDO10_1: C3_U_LDO10.1 C4_U_LDO10.1 JP1_U_LDO10.1 LDO1_U_LDO10.6 R2_U_LDO10.0 | length 1289.9
  Top Layer w8: LDO1_U_LDO10.6@6899.68,2864.47 6899.68,3005.68 6930,3036 R2_U_LDO10.0@6930,3123 ; C3_U_LDO10.1@6931,3035 6931,2996 7044,2883 7144,2883 ; JP1_U_LDO10.1@7056,2459 JP1_U_LDO10.1@7046,2449 6980,2515 6980,2716 7037,2773 7125,2773 7144,2792 7144,2883 ; C4_U_LDO10.1@7269,2883 7144,2883
NetC3_U_LDO11_0: C3_U_LDO11.0 LDO1_U_LDO11.7 Pot1_U_LDO11.3 R2_U_LDO11.1 | length 790.7
  Top Layer w8: v1(3081,3990) 3105,3966 C3_U_LDO11.0@3171,3966 ; R2_U_LDO11.1@3170,4054 3170,3967 C3_U_LDO11.0@3171,3966 ; LDO1_U_LDO11.7@3194.09,3795.47 3194.09,3942.91 C3_U_LDO11.0@3171,3966
  Bottom Layer w8: v1(3081,3990) 3133,3990 3366.5,3756.5 Pot1_U_LDO11.3@3406.5,3756.5
NetC3_U_LDO11_1: C3_U_LDO11.1 C4_U_LDO11.1 JP1_U_LDO11.1 LDO1_U_LDO11.6 R2_U_LDO11.0 | length 1289.9
  Top Layer w8: LDO1_U_LDO11.6@3219.68,3795.47 3219.68,3936.68 3250,3967 R2_U_LDO11.0@3250,4054 ; C3_U_LDO11.1@3251,3966 3251,3927 3364,3814 3464,3814 ; JP1_U_LDO11.1@3376,3390 JP1_U_LDO11.1@3366,3380 3300,3446 3300,3647 3357,3704 3445,3704 3464,3723 3464,3814 ; C4_U_LDO11.1@3589,3814 3464,3814
NetC3_U_LDO12_0: C3_U_LDO12.0 LDO1_U_LDO12.7 Pot1_U_LDO12.3 R2_U_LDO12.1 | length 790.7
  Top Layer w8: v1(4001,3990) 4025,3966 C3_U_LDO12.0@4091,3966 ; R2_U_LDO12.1@4090,4054 4090,3967 C3_U_LDO12.0@4091,3966 ; LDO1_U_LDO12.7@4114.09,3795.47 4114.09,3942.91 C3_U_LDO12.0@4091,3966
  Bottom Layer w8: v1(4001,3990) 4053,3990 4286.5,3756.5 Pot1_U_LDO12.3@4326.5,3756.5
NetC3_U_LDO12_1: C3_U_LDO12.1 C4_U_LDO12.1 JP1_U_LDO12.1 LDO1_U_LDO12.6 R2_U_LDO12.0 | length 1289.9
  Top Layer w8: LDO1_U_LDO12.6@4139.68,3795.47 4139.68,3936.68 4170,3967 R2_U_LDO12.0@4170,4054 ; C3_U_LDO12.1@4171,3966 4171,3927 4284,3814 4384,3814 ; JP1_U_LDO12.1@4296,3390 JP1_U_LDO12.1@4286,3380 4220,3446 4220,3647 4277,3704 4365,3704 4384,3723 4384,3814 ; C4_U_LDO12.1@4509,3814 4384,3814
NetC3_U_LDO13_0: C3_U_LDO13.0 LDO1_U_LDO13.7 Pot1_U_LDO13.3 R2_U_LDO13.1 | length 790.7
  Top Layer w8: v1(4921,3990) 4945,3966 C3_U_LDO13.0@5011,3966 ; R2_U_LDO13.1@5010,4054 5010,3967 C3_U_LDO13.0@5011,3966 ; LDO1_U_LDO13.7@5034.09,3795.47 5034.09,3942.91 C3_U_LDO13.0@5011,3966
  Bottom Layer w8: v1(4921,3990) 4973,3990 5206.5,3756.5 Pot1_U_LDO13.3@5246.5,3756.5
NetC3_U_LDO13_1: C3_U_LDO13.1 C4_U_LDO13.1 JP1_U_LDO13.1 LDO1_U_LDO13.6 R2_U_LDO13.0 | length 1289.9
  Top Layer w8: LDO1_U_LDO13.6@5059.68,3795.47 5059.68,3936.68 5090,3967 R2_U_LDO13.0@5090,4054 ; C3_U_LDO13.1@5091,3966 5091,3927 5204,3814 5304,3814 ; JP1_U_LDO13.1@5216,3390 JP1_U_LDO13.1@5206,3380 5140,3446 5140,3647 5197,3704 5285,3704 5304,3723 5304,3814 ; C4_U_LDO13.1@5429,3814 5304,3814
NetC9_1: C9.1 SMA2.5
NetC12_1: C12.1 SMA4.5
NetC15_1: C15.1 SMA3.5
NetJP1_U_LDO1_2: JP1_U_LDO1.2 JP2_U_LDO1.2 R1_U_LDO1.0 | length 341.5
  Top Layer w8: JP1_U_LDO1.2@3466,1518 3466,1600 3527,1661 R1_U_LDO1.0@3581,1661 3679,1661 JP2_U_LDO1.2@3694,1646
NetJP1_U_LDO2_2: JP1_U_LDO2.2 JP2_U_LDO2.2 R1_U_LDO2.0 | length 341.5
  Top Layer w8: JP1_U_LDO2.2@4386,1518 4386,1600 4447,1661 R1_U_LDO2.0@4501,1661 4599,1661 JP2_U_LDO2.2@4614,1646
NetJP1_U_LDO3_2: JP1_U_LDO3.2 JP2_U_LDO3.2 R1_U_LDO3.0 | length 341.5
  Top Layer w8: JP1_U_LDO3.2@5306,1518 5306,1600 5367,1661 R1_U_LDO3.0@5421,1661 5519,1661 JP2_U_LDO3.2@5534,1646
NetJP1_U_LDO4_2: JP1_U_LDO4.2 JP2_U_LDO4.2 R1_U_LDO4.0 | length 341.5
  Top Layer w8: JP1_U_LDO4.2@6226,1518 6226,1600 6287,1661 R1_U_LDO4.0@6341,1661 6439,1661 JP2_U_LDO4.2@6454,1646
NetJP1_U_LDO5_2: JP1_U_LDO5.2 JP2_U_LDO5.2 R1_U_LDO5.0 | length 341.5
  Top Layer w8: JP1_U_LDO5.2@7146,1518 7146,1600 7207,1661 R1_U_LDO5.0@7261,1661 7359,1661 JP2_U_LDO5.2@7374,1646
NetJP1_U_LDO6_2: JP1_U_LDO6.2 JP2_U_LDO6.2 R1_U_LDO6.0 | length 341.5
  Top Layer w8: JP1_U_LDO6.2@3466,2449 3466,2531 3527,2592 R1_U_LDO6.0@3581,2592 3679,2592 JP2_U_LDO6.2@3694,2577
NetJP1_U_LDO7_2: JP1_U_LDO7.2 JP2_U_LDO7.2 R1_U_LDO7.0 | length 341.5
  Top Layer w8: JP1_U_LDO7.2@4386,2449 4386,2531 4447,2592 R1_U_LDO7.0@4501,2592 4599,2592 JP2_U_LDO7.2@4614,2577
NetJP1_U_LDO8_2: JP1_U_LDO8.2 JP2_U_LDO8.2 R1_U_LDO8.0 | length 341.5
  Top Layer w8: JP1_U_LDO8.2@5306,2449 5306,2531 5367,2592 R1_U_LDO8.0@5421,2592 5519,2592 JP2_U_LDO8.2@5534,2577
NetJP1_U_LDO9_2: JP1_U_LDO9.2 JP2_U_LDO9.2 R1_U_LDO9.0 | length 341.5
  Top Layer w8: JP1_U_LDO9.2@6226,2449 6226,2531 6287,2592 R1_U_LDO9.0@6341,2592 6439,2592 JP2_U_LDO9.2@6454,2577
NetJP1_U_LDO10_2: JP1_U_LDO10.2 JP2_U_LDO10.2 R1_U_LDO10.0 | length 341.5
  Top Layer w8: JP1_U_LDO10.2@7146,2449 7146,2531 7207,2592 R1_U_LDO10.0@7261,2592 7359,2592 JP2_U_LDO10.2@7374,2577
NetJP1_U_LDO11_2: JP1_U_LDO11.2 JP2_U_LDO11.2 R1_U_LDO11.0 | length 341.5
  Top Layer w8: JP1_U_LDO11.2@3466,3380 3466,3462 3527,3523 R1_U_LDO11.0@3581,3523 3679,3523 JP2_U_LDO11.2@3694,3508
NetJP1_U_LDO12_2: JP1_U_LDO12.2 JP2_U_LDO12.2 R1_U_LDO12.0 | length 341.5
  Top Layer w8: JP1_U_LDO12.2@4386,3380 4386,3462 4447,3523 R1_U_LDO12.0@4501,3523 4599,3523 JP2_U_LDO12.2@4614,3508
NetJP1_U_LDO13_2: JP1_U_LDO13.2 JP2_U_LDO13.2 R1_U_LDO13.0 | length 341.5
  Top Layer w8: JP1_U_LDO13.2@5306,3380 5306,3462 5367,3523 R1_U_LDO13.0@5421,3523 5519,3523 JP2_U_LDO13.2@5534,3508
NetJP5_1: JP5.1 Pot2.2
NetJP6_1: JP6.1 Pot3.2
NetJP7_1: JP7.1 Pot4.2
NetJP8_1: JP8.1 Pot5.2
NetJP9_1: JP9.1 Pot6.2
NetPot2_1: Pot2.1 R9.0
NetPot3_1: Pot3.1 R10.0
NetPot4_1: Pot4.1 R11.0
NetPot4_3: Pot4.3 R14.1
NetPot5_1: Pot5.1 R12.0
NetPot5_3: Pot5.3 R15.1
NetPot6_1: Pot6.1 R13.0
NetPot6_3: Pot6.3 R16.1
NetR17_U_SUPPLY_DECAP_NW7_0: R17_U_SUPPLY_DECAP_NW7.0
OUT_U_LDO1: C2_U_LDO1.1 JP2_U_LDO1.1 R1_U_LDO1.1 R11.1 R12.1 R13.1 | length 242.8
  Top Layer w8: R1_U_LDO1.1@3581,1741 3689,1741 3689,1873 C2_U_LDO1.1@3691,1875
OUT_U_LDO2: C2_U_LDO2.1 C19_U_SUPPLY_DECAP_NW9.1 C20_U_SUPPLY_DECAP_NW9.1 C21_U_SUPPLY_DECAP_NW9.1 JP2_U_LDO2.1 R1_U_LDO2.1 R17_U_SUPPLY_DECAP_NW9.1 | length 439.8
  Top Layer w8: C21_U_SUPPLY_DECAP_NW9.1@859,6364 v1(956,6364) ; R1_U_LDO2.1@4501,1741 4609,1741 4609,1873 C2_U_LDO2.1@4611,1875
  Bottom Layer w8: C19_U_SUPPLY_DECAP_NW9.1@856,6364 v1(956,6364)
OUT_U_LDO4: C2_U_LDO4.1 C19_U_SUPPLY_DECAP_NW1.1 C20_U_SUPPLY_DECAP_NW1.1 C21_U_SUPPLY_DECAP_NW1.1 JP2_U_LDO4.1 R1_U_LDO4.1 R17_U_SUPPLY_DECAP_NW1.1 | length 439.8
  Top Layer w8: C21_U_SUPPLY_DECAP_NW1.1@5994,3246 v1(6091,3246) ; R1_U_LDO4.1@6341,1741 6449,1741 6449,1873 C2_U_LDO4.1@6451,1875
  Bottom Layer w8: C19_U_SUPPLY_DECAP_NW1.1@5991,3246 v1(6091,3246)
OUT_U_LDO5: C2_U_LDO5.1 C19_U_SUPPLY_DECAP_NW5.1 C20_U_SUPPLY_DECAP_NW5.1 C21_U_SUPPLY_DECAP_NW5.1 JP2_U_LDO5.1 R1_U_LDO5.1 R17_U_SUPPLY_DECAP_NW5.1 | length 439.8
  Top Layer w8: v1(2576,6463) C21_U_SUPPLY_DECAP_NW5.1@2673,6463 ; R1_U_LDO5.1@7261,1741 7369,1741 7369,1873 C2_U_LDO5.1@7371,1875
  Bottom Layer w8: v1(2576,6463) C19_U_SUPPLY_DECAP_NW5.1@2676,6463
OUT_U_LDO6: C2_U_LDO6.1 C19_U_SUPPLY_DECAP_NW3.1 C20_U_SUPPLY_DECAP_NW3.1 C21_U_SUPPLY_DECAP_NW3.1 JP2_U_LDO6.1 R1_U_LDO6.1 R17_U_SUPPLY_DECAP_NW3.1 | length 439.8
  Top Layer w8: v1(1123,5931) C21_U_SUPPLY_DECAP_NW3.1@1220,5931 ; R1_U_LDO6.1@3581,2672 3689,2672 3689,2804 C2_U_LDO6.1@3691,2806
  Bottom Layer w8: v1(1123,5931) C19_U_SUPPLY_DECAP_NW3.1@1223,5931
OUT_U_LDO7: C2_U_LDO7.1 C19_U_SUPPLY_DECAP_NW10.1 C20_U_SUPPLY_DECAP_NW10.1 C21_U_SUPPLY_DECAP_NW10.1 JP2_U_LDO7.1 R1_U_LDO7.1 R17_U_SUPPLY_DECAP_NW10.1 | length 434.8
  Top Layer w8: R1_U_LDO7.1@4501,2672 4609,2672 4609,2804 C2_U_LDO7.1@4611,2806
  Top Layer w15: C21_U_SUPPLY_DECAP_NW10.1@889,6613 v1(986,6613)
  Bottom Layer w15: C19_U_SUPPLY_DECAP_NW10.1@892,6612 986,6612 v1(986,6613)
OUT_U_LDO8: C2_U_LDO8.1 C19_U_SUPPLY_DECAP_NW7.1 C20_U_SUPPLY_DECAP_NW7.1 C21_U_SUPPLY_DECAP_NW7.1 JP2_U_LDO8.1 R1_U_LDO8.1 R17_U_SUPPLY_DECAP_NW7.1 | length 439.8
  Top Layer w8: C21_U_SUPPLY_DECAP_NW7.1@1958,5709 v1(1958,5806) ; R1_U_LDO8.1@5421,2672 5529,2672 5529,2804 C2_U_LDO8.1@5531,2806
  Bottom Layer w8: C19_U_SUPPLY_DECAP_NW7.1@1958,5706 v1(1958,5806)
OUT_U_LDO9: C2_U_LDO9.1 C19_U_SUPPLY_DECAP_NW6.1 C20_U_SUPPLY_DECAP_NW6.1 C21_U_SUPPLY_DECAP_NW6.1 JP2_U_LDO9.1 R1_U_LDO9.1 R17_U_SUPPLY_DECAP_NW6.1 | length 439.8
  Top Layer w8: C21_U_SUPPLY_DECAP_NW6.1@1695,5614 v1(1695,5711) ; R1_U_LDO9.1@6341,2672 6449,2672 6449,2804 C2_U_LDO9.1@6451,2806
  Bottom Layer w8: C19_U_SUPPLY_DECAP_NW6.1@1695,5611 v1(1695,5711)
OUT_U_LDO10: C2_U_LDO10.1 C19_U_SUPPLY_DECAP_NW2.1 C20_U_SUPPLY_DECAP_NW2.1 C21_U_SUPPLY_DECAP_NW2.1 JP2_U_LDO10.1 R1_U_LDO10.1 R17_U_SUPPLY_DECAP_NW2.1 | length 439.8
  Top Layer w8: C21_U_SUPPLY_DECAP_NW2.1@6746,3246 v1(6843,3246) ; R1_U_LDO10.1@7261,2672 7369,2672 7369,2804 C2_U_LDO10.1@7371,2806
  Bottom Layer w8: C19_U_SUPPLY_DECAP_NW2.1@6743,3246 v1(6843,3246)
OUT_U_LDO11: C2_U_LDO11.1 C16.1 C19_U_SUPPLY_DECAP_NW8.1 C20_U_SUPPLY_DECAP_NW8.1 C21_U_SUPPLY_DECAP_NW8.1 JP2_U_LDO11.1 JP7.3 R1_U_LDO11.1 R17_U_SUPPLY_DECAP_NW8.1 | length 439.8
  Top Layer w8: C21_U_SUPPLY_DECAP_NW8.1@865,6160 v1(962,6160) ; R1_U_LDO11.1@3581,3603 3689,3603 3689,3735 C2_U_LDO11.1@3691,3737
  Bottom Layer w8: C19_U_SUPPLY_DECAP_NW8.1@862,6160 v1(962,6160)
OUT_U_LDO12: C2_U_LDO12.1 C17.1 C19_U_SUPPLY_DECAP_NW4.1 C20_U_SUPPLY_DECAP_NW4.1 C21_U_SUPPLY_DECAP_NW4.1 JP2_U_LDO12.1 JP8.3 JP9.3 R1_U_LDO12.1 R17_U_SUPPLY_DECAP_NW4.1 | length 439.8
  Top Layer w8: v1(2539,6676) C21_U_SUPPLY_DECAP_NW4.1@2636,6676 ; R1_U_LDO12.1@4501,3603 4609,3603 4609,3735 C2_U_LDO12.1@4611,3737
  Bottom Layer w8: v1(2539,6676) C19_U_SUPPLY_DECAP_NW4.1@2639,6676
OUT_U_LDO13: C2_U_LDO13.1 C7.0 JP2_U_LDO13.1 R1_U_LDO13.1 R9.1 R10.1 | length 242.8
  Top Layer w8: R1_U_LDO13.1@5421,3603 5529,3603 5529,3735 C2_U_LDO13.1@5531,3737
PD_DLL_OUT: *.1 JP4.1 JP4.2
PHASE_DLL_PHASE_OUT: *.43 C15.0
PLL_CLK_OUT: *.37
PLL_CLK_OUTB: *.39 C12.0
PLL_EXT_VCTRL: *.31 C18.0 JP9.2
READ_SERIAL_OUT: *.20 SOP2.11
RESETB: *.19 SOP2.13
SCAN_CLK: *.25 SOP1.11
SCAN_CLK2: *.24 SOP1.12
SCAN_EN: *.23 SOP1.10
SCAN_IN: *.22 SOP1.13
SCAN_LOAD: *.28 SOP2.12
SCAN_OUT: *.26 SOP2.10
VDD_CHIP: *.41 R17_U_SUPPLY_DECAP_NW2.0
VDD_DLL_OUT_CHIP: *.45 R17_U_SUPPLY_DECAP_NW1.0
VDD_NO_COUNT_CHIP: *.2 R17_U_SUPPLY_DECAP_NW10.0
VDD_OSCILLATOR_CHIP: *.33 *.34 R17_U_SUPPLY_DECAP_NW4.0
VDD_OUTPUTBUFF_CHIP: *.35 R17_U_SUPPLY_DECAP_NW3.0
VDD_PC_CHIP: *.14 *.15
VDD_PD_CHIP: *.17 R17_U_SUPPLY_DECAP_NW6.0
VDD_REF_CHIP: *.7 R17_U_SUPPLY_DECAP_NW9.0
VDD_SCAN_CHIP: *.21 R17_U_SUPPLY_DECAP_NW5.0
VDD_VCDL_CHIP: *.11 *.12 R17_U_SUPPLY_DECAP_NW8.0
pads on no net: C18.1 JP3.1 JP3.6 Pot2.3 Pot3.3 SMA1.5
copper on no net: | length 707.5
  Top Layer w8: 1830,7380 1832,7380 ; 1844,6451 1844,6564.58 cw(c1944,6564.58) 1873.29,6635.29 2075.71,6837.71 ccw(c2005,6908.42) 2105,6908.42 2105,7057

## Silkscreen, mask and mechanical layers (free items; w line width, h text height)
Top Overlay:
  text "R2" at 4241,4024 h60
  text "C3" at 4232,3934 h60
  text "C1" at 4015,3886 h60 r90
  text "C2" at 4582,3869 h60
  text "C4" at 4448,3867 h60
  text "R1" at 4469,3405 h60
  text "JP2" at 4576,3381 h60
  text "C5" at 4089,3260 h60
  text "JP1" at 4257,3256 h60
  text "C21" at 6471,3216 h60
  text "R17" at 6983,3214 h60
Bottom Overlay:
  text "C19" at 6462,3218 h60
  text "C20" at 6981,3218 h60